# Altium PCB PCB2.PcbDoc
Units mil, origin at the board's own origin, x right, y up, seen from the top; angles counter-clockwise.
Board outline 3715 x 6645 mil, 2 copper layers (Top Layer, Bottom Layer); 85 components, 79 nets, 287 pads, 32 vias.
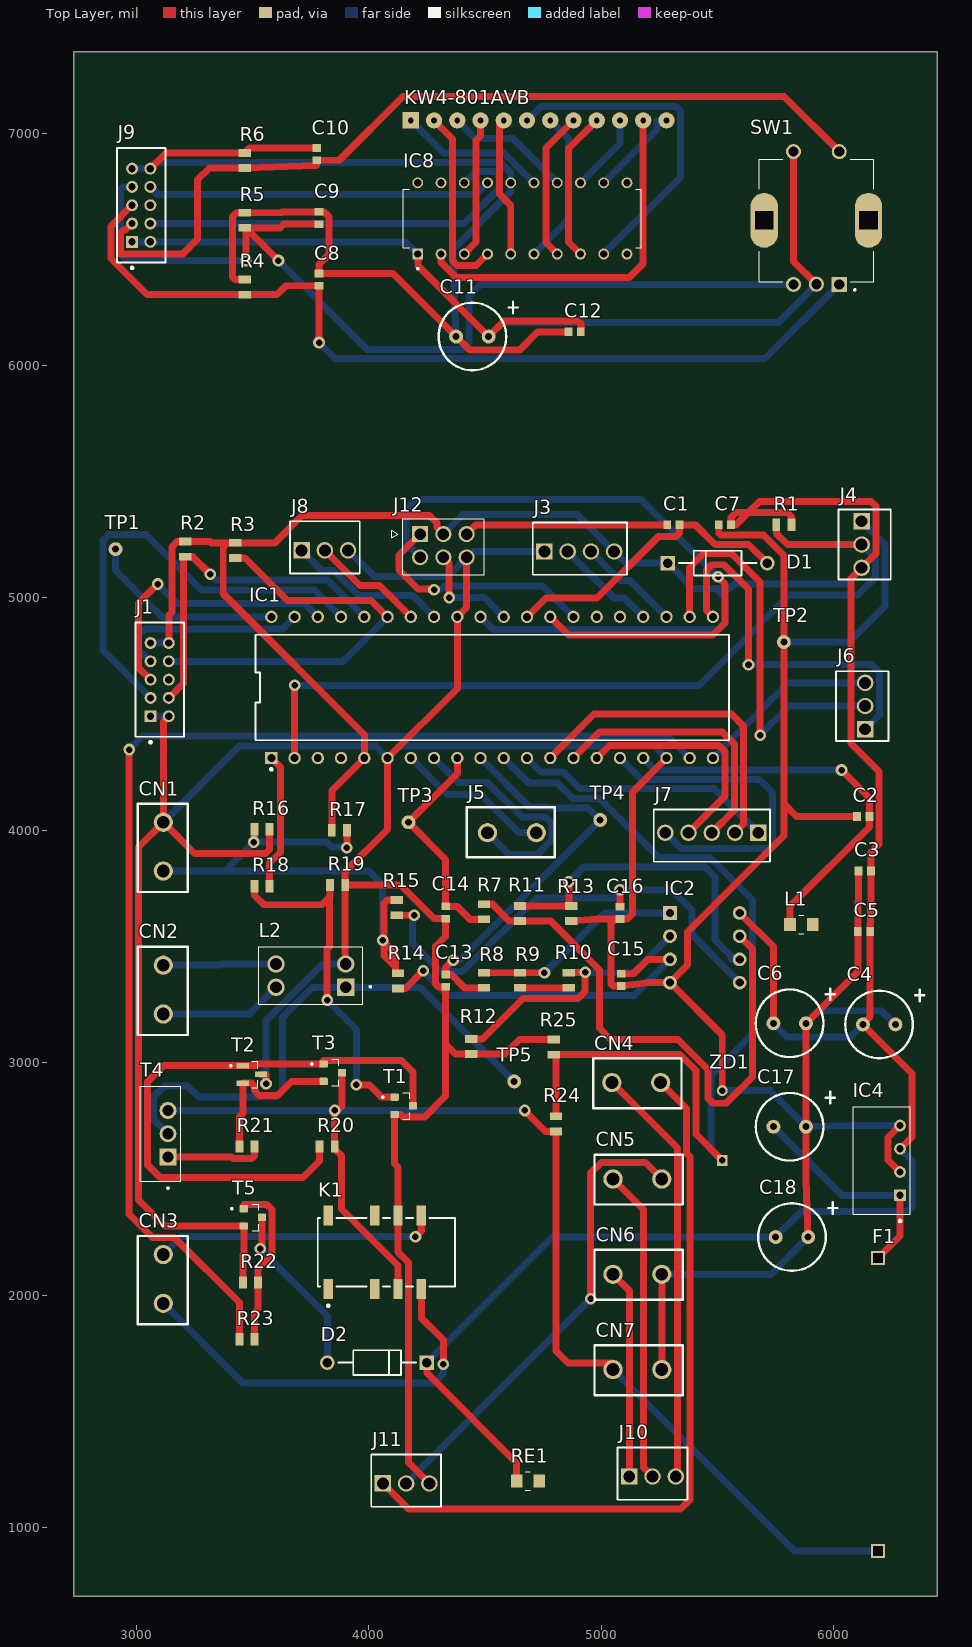
[diagram p0: Top Layer view]
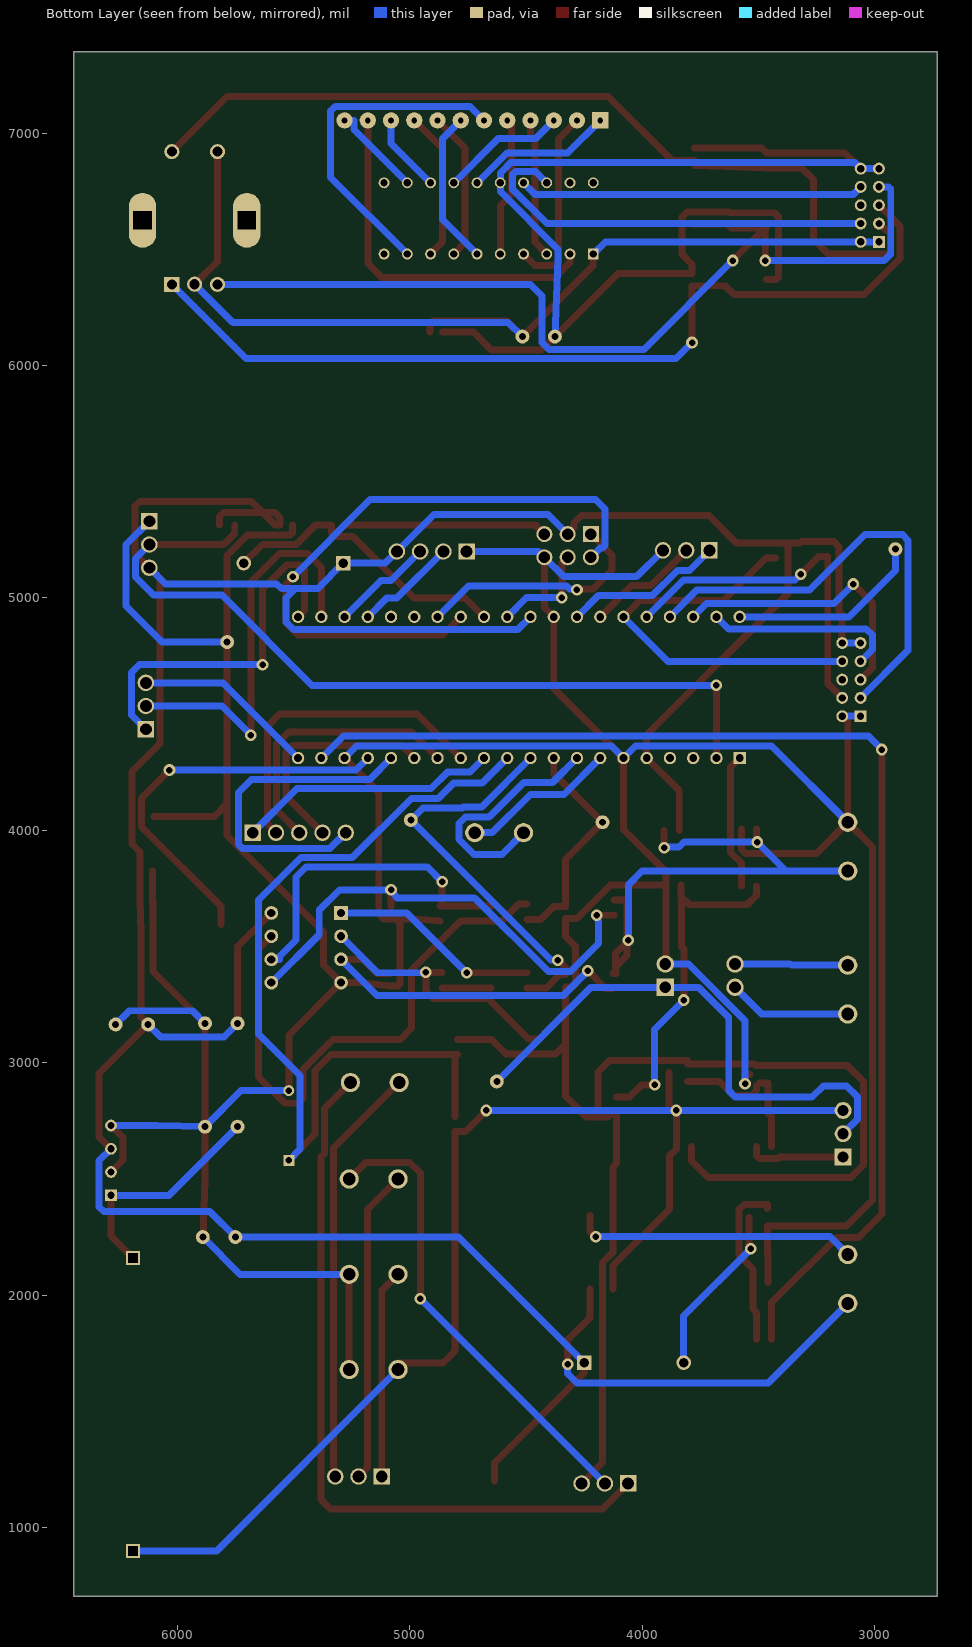
[diagram p1: Bottom Layer view, seen from below]

## Layer stack, top to bottom
Top Solder: solder mask 0.4, Solder Resist, Dk 3.5
Top Layer: signal copper 1.4
Dielectric 1: dielectric 12.6, FR-4, Dk 4.8
Bottom Layer: signal copper 1.4
Bottom Solder: solder mask 0.4, Solder Resist, Dk 3.5

## Board outline
2730,705 6445,705 6445,7350 2730,7350

## Design rules (kind name [scope] priority, off if disabled: settings)
Clearance [All] p1: gap=10 ignorepadtopadclearanceinfootprint=FALSE
HoleSize [All] p1: absolutevalues=TRUE maxlimit=120 minlimit=1 maxpercent=80.000 minpercent=20.000
PolygonConnect [All] p1: connectstyle=Relief reliefconductorwidth=10 reliefentries=4 polygonreliefangle="90 Angle" airgapwidth=10
RoutingVias [All] p1: holewidth=28 width=50 viastyle="Through Hole" minholewidth=28 minwidth=50 maxholewidth=28 maxwidth=50
SolderMaskExpansion [All] p1: expansion=4 istentingtop=FALSE
Width [All] p1: maxlimit=30 minlimit=10 preferedwidth=30 minimp=50.000000 maximp=50.000000 favimp=50.000000
29 further rules are at their usual default settings.

## Classes and differential pairs
component class VoedingBat20V: C17 C18 CN3 CN4 CN5 CN6 CN7 D2 F1 IC4 J10 J11 K1 R22 R23 R24 R25 RE1 T5 ZD1
component class SolBout: CN2 L2 R18 R19 R20 R21 T1 T2 T3 T4 TP5
component class SolBin: C13 C14 C15 C16 CN1 IC2 R7 R8 R9 R10 R11 R12 R13 R14 R15 R16 R17 TP3 TP4
component class Display: C8 C9 C10 C11 C12 IC8 J9 KW4-801AVB R4 R5 R6 SW1
component class CPU: C1 C2 C3 C4 C5 C6 C7 D1 IC1 J1 J3 J4 J5 J6 J7 J8 J12 L1 R1 R2 R3 TP1 TP2

## Components (designator, comment, footprint, x,y, rotation, side; value= is the part's Value field where it differs from the comment)
C1 "10n" CAPA 5310,5315 r0 top
C2 "100n" CAPA 6126.57,4060 r0 top
C3 "100n" CAPA 6133.43,3825 r0 top
C4 "10µF 50V" CAPA1 6195,3165 r0 top
C5 "100n" CAPA 6130,3565 r0 top
C6 "10µF 50V" CAPA1 5810,3170 r0 top
C7 "10n" CAPA 5531.57,5315 r0 top
C8 "10n" CAPA 3785,6370 r90 top
C9 "10n" CAPA 3785,6635 r90 top
C10 "10n" CAPA 3775,6910 r90 top
C11 "100µF" CAPA1 4445,6125 r0 top
C12 "100n" CAPA 4885,6145 r180 top
C13 "10n" CAPA 4330,3353.43 r90 top
C14 "10n" CAPA 4330,3646.57 r90 top
C15 "10n" CAPA 5085,3356.57 r90 top
C16 "10n" CAPA 5080,3645 r90 top
C17 "100µF 25V" CAPA1 5810,2725 r0 top
C18 "10µF 50V" CAPA1 5820,2250 r0 top
CN1 "1725656" "2 pinHeader" 3115,3930 r0 top
CN2 "1725656" "2 pinHeader" 3115,3315 r0 top
CN3 "1725656" "2 pinHeader" 3115,2070 r0 top
CN4 "Lader" "2 pinHeader" 5150,2915 r90 top
CN5 "Batterij 20V 2Ah - 4Ah" "2 pinHeader" 5155,2500 r90 top
CN6 "1725656" "2 pinHeader" 5155,2090 r90 top
CN7 "1725656" "2 pinHeader" 5155,1680 r90 top
D1 "1N4148" DIOD 5500,5150 r0 top
D2 "1N4007" DIOD 4035,1710 r180 top
F1 "F1" F1 6190,900 r90 top
IC1 "ATMEGA4809-PF" CPU 4530,4615 r90 top
IC2 "MCP6002-E/P" PDIP300-P8 5445,3495 r0 top
IC4 "OKI-78SR-5/1.5-W36-C" SIP625W50P254L1173H771Q4 6285,2430 r90 top
IC8 "IC1" DIP778W43P254L2612H431Q20N 4660,6633.15 r90 top
J1 "DF11-10DP-2DSA(24)" FP-DF11-10DP-2DSA_24-MFG 3099.37,4648.74 r90 top
J3 "640456-4" 4PinH 4755,5200 r0 top
J4 "B3B-PH-K-S(LF)(SN)" 3PinH 6120,5330 r270 top
J5 "1725656" "2 pinHeader" 4615,3990 r270 top
J6 "B3B-PH-K-S(LF)(SN)" 3PinH 6135,4435 r90 top
J7 "53261-0571" 5PinH 5675,3990 r180 top
J8 "B3B-PH-K-S(LF)(SN)" 3PinH 3710,5205 r0 top
J9 "DF11-10DP-2DSA(24)" FP-DF11-10DP-2DSA_24-MFG 3020,6690 r90 top
J10 "B3B-PH-K-S(LF)(SN)" 3PinH 5120,1220 r0 top
J11 "B3B-PH-K-S(LF)(SN)" 3PinH 4060,1190 r0 top
J12 "610106249121" 6Pin-Header 4220,5275 r180 top
K1 "G6S-2F-DC5" VermogenRelais 4075,2185 r0 top
KW4-801AVB "Display" DISP 4730,7055 r0 top
L1 "10µH" Smoorspoel 5860,3595 r0 top
L2 "Spoel" Spoel 3750,3375 r180 top
R1 "4K7" REST 5785,5315 r0 top
R2 "4K7" REST 3210,5210 r90 top
R3 "4K7" REST 3425,5205 r90 top
R4 "10K" REST 3465,6337.52 r90 top
R5 "10K" REST 3465,6625 r90 top
R6 "10K" REST 3465,6882.48 r90 top
R7 "5K6" REST 4495,3650 r90 top
R8 "5K6" REST 4495,3355 r90 top
R9 "18K" REST 4650,3355 r270 top
R10 "18K" REST 4860,3355 r90 top
R11 "18K" REST 4650,3642.48 r90 top
R12 "100E" REST 4440,3070 r90 top
R13 "100E" REST 4870,3642.48 r90 top
R14 "5K6" REST 4125,3352.48 r90 top
R15 "5K6" REST 4120,3667.48 r90 top
R16 "10M" REST 3540,4005 r180 top
R17 "1M" REST 3872.48,4000 r180 top
R18 "10K" REST 3540,3760 r180 top
R19 "4,7K" REST 3865,3765 r180 top
R20 "4,7K" REST 3820,2640 r0 top
R21 "100E" REST 3475,2640 r0 top
R22 "4,7K" REST 3490,2055 r180 top
R23 "10K" REST 3475,1810 r180 top
R24 "6,8K" REST 4805,2737.48 r90 top
R25 "10K" REST 4795,3067.48 r90 top
RE1 "SmoorSpoel" Smoorspoel 4683.43,1200 r0 top
SW1 "SW1" SW1 5925,6625 r180 top
T1 "BC847B" TRANS 4150,2815 r0 top
T2 "BC857C" SOT95P240X120-3N 3496.02,2950 r0 top
T3 "BC847B" TRANS 3844.37,2957.6 r0 top
T4 "MOSFET" TO254P1041X444X1930-3 3103.11,2695 r90 top
T5 "BC847B" TRANS 3500.63,2335 r0 top
TP1 "TP" TP 2910,5210 r0 top
TP2 "TP" TP 5785,4810 r0 top
TP3 "TP" TP 4170,4035 r0 top
TP4 "TP" TP 4995,4045 r0 top
TP5 "TP" TP 4625,2920 r0 top
ZD1 "5V1" ZEN 5520,2730.12 r90 top

## Footprints (in the part's own frame and the unit in brackets; to place one, negate y for a bottom-side part, rotate by r counter-clockwise, add the part's x,y. Pads: shape width x height; smd on the part's side, far side on the other; paste and mask are expansions set on the pad)
"2 pinHeader" [mm]
  round 2.1 hole 1.4: 1(0,-2.667) 2(0,2.667)
  silkscreen extent -2.79,-4.95 2.67,4.7
3PinH [mm] "TECO-640456-6_V"
  rect 1.8x1.8 hole 1.3: 1(0,0)
  round 1.8 hole 1.3: 2(2.54,0) 3(5.08,0)
  silkscreen extent -1.27,-2.54 6.35,3.18, body extent -1.27,-2.61 6.22,3.11, height 10.03
4PinH [mm] "TECO-640456-6_V"
  rect 1.8x1.8 hole 1.3: 1(0,0)
  round 1.8 hole 1.3: 2(2.54,0) 3(5.08,0) 4(7.62,0)
  silkscreen extent -1.27,-2.54 9.02,3.17, body extent -1.27,-2.54 9.02,3.17, height 10.03
5PinH [mm] "TECO-640456-6_V"
  rect 1.8x1.8 hole 1.3: 1(0,0)
  round 1.8 hole 1.3: 2(2.54,0) 3(5.08,0) 4(7.62,0) 5(10.16,0)
  silkscreen extent -1.27,-2.54 11.43,3.18, body extent -1.27,-2.54 11.43,3.18, height 10.03
6Pin-Header [mm] "MOLEX_1510481611"
  rect 1.75x1.75 / inner round 1.75 / far side rect 1.75x1.75 hole 1.25 mask+0.076: 1(0,0)
  round 1.75 hole 1.25 mask+0.076: 2(-2.54,0) 3(-5.08,0) 4(0,2.54) 5(-2.54,2.54) 6(-5.08,2.54)
  silkscreen extent -6.98,-1.65 3.13,4.44
CAPA [mm]
  rect 0.85x0.95 smd: 1(-0.675,0) 2(0.675,0)
  body extent -0.85,-0.45 0.85,0.45, height 0.9
CAPA1 [mil]
  round 60 hole 30: 1(-70,0) 2(70,0)
  silkscreen extent -145,-145 195,150
CPU [mm] "FP-C04-016-MFG"
  rect 1.35x1.35 hole 0.85 paste-2539.97 mask+0: 1(-7.715,24.13)
  round 1.35 hole 0.85 paste-2539.97 mask+0: 2(-7.715,21.59) 3(-7.715,19.05) 4(-7.715,16.51) 5(-7.715,13.97) 6(-7.715,11.43) 7(-7.715,8.89) 8(-7.715,6.35) 9(-7.715,3.81) 10(-7.715,1.27) 11(-7.715,-1.27) 12(-7.715,-3.81) 13(-7.715,-6.35) 14(-7.715,-8.89) 15(-7.715,-11.43) 16(-7.715,-13.97) 17(-7.715,-16.51) 18(-7.715,-19.05) 19(-7.715,-21.59) 20(-7.715,-24.13) 21(7.715,-24.13) 22(7.715,-21.59) 23(7.715,-19.05) 24(7.715,-16.51) 25(7.715,-13.97) 26(7.715,-11.43) 27(7.715,-8.89) 28(7.715,-6.35) 29(7.715,-3.81) 30(7.715,-1.27) 31(7.715,1.27) 32(7.715,3.81) 33(7.715,6.35) 34(7.715,8.89) 35(7.715,11.43) 36(7.715,13.97) 37(7.715,16.51) 38(7.715,19.05) 39(7.715,21.59) 40(7.715,24.13)
  silkscreen extent -9.07,-25.88 5.76,25.88, body extent -8.49,-26.71 8.49,26.71, height 0.25
DIOD [mm] "FP-1N4001-E3-54-MFG"
  rect 1.6x1.6 hole 1.05 paste-2539.97 mask+0: 1(-5.438,0)
  round 1.6 hole 1.05 paste-2539.97 mask+0: 2(5.438,0)
  silkscreen extent -4.24,-1.35 4.24,1.35, body extent -6.34,-1.45 6.34,1.45, height 0.25
DIP778W43P254L2612H431Q20N [mm] "Led drive control"
  rect 1.19x1.19 hole 0.79: 1(-3.89,11.43)
  round 1.19 hole 0.79: 2(-3.89,8.89) 3(-3.89,6.35) 4(-3.89,3.81) 5(-3.89,1.27) 6(-3.89,-1.27) 7(-3.89,-3.81) 8(-3.89,-6.35) 9(-3.89,-8.89) 10(-3.89,-11.43) 11(3.89,-11.43) 12(3.89,-8.89) 13(3.89,-6.35) 14(3.89,-3.81) 15(3.89,-1.27) 16(3.89,1.27) 17(3.89,3.81) 18(3.89,6.35) 19(3.89,8.89) 20(3.89,11.43)
  silkscreen extent -5.58,-13 3.2,13, body extent -4.03,-13 4.03,13, height 4.31
DISP [mil]
  rect 70x70 hole 25: 1(-550,0)
  round 70 hole 25: 2(-450,0) 3(-350,0) 4(-250,0) 5(-150,0) 6(-50,0) 7(50,0) 8(150,0) 9(250,0) 10(350,0) 11(450,0) 12(550,0)
F1 [mil]
  rect 60x60 hole 40 square: 1(0,0) 2(1259.84,0)
FP-DF11-10DP-2DSA_24-MFG [mm]
  rect 1.3x1.3 hole 0.8 paste-2539.97 mask+0: 1(-4,1)
  round 1.3 hole 0.8 paste-2539.97 mask+0: 2(-4,-1) 3(-2,1) 4(-2,-1) 5(0,1) 6(0,-1) 7(2,1) 8(2,-1) 9(4,1) 10(4,-1)
  silkscreen extent -6.97,-2.65 6.25,2.65, body extent -6.35,-2.75 6.35,2.75, height 0.25
PDIP300-P8 [mm] "8-Pin Plastic Dual In-Line Package (PDIP)"
  rect 1.5x1.5 hole 0.9: 1(-3.81,3.81)
  round 1.5 hole 0.9: 2(-3.81,1.27) 3(-3.81,-1.27) 4(-3.81,-3.81) 5(3.81,-3.81) 6(3.81,-1.27) 7(3.81,1.27) 8(3.81,3.81)
  body extent -3.55,-4.9 3.55,4.9, height 4.32
REST [mm]
  rect 0.85x1.35 smd: 1(-0.825,0) 2(0.825,0)
  body extent -1.1,-0.72 1.1,0.72, height 0.5
SIP625W50P254L1173H771Q4 [mm]
  rect 1.288x1.288 hole 0.78: 1(0,0)
  round 1.288 hole 0.78: 2(2.54,0) 3(5.08,0) 4(7.62,0)
  silkscreen extent -2.9,-1.14 9.68,5.13
Smoorspoel [mm] "INDM2520X190N"
  rect 1.26x1.41 smd: 1(-1.23,0) 2(1.23,0)
  silkscreen extent -0.28,-1 0.28,1, body extent -1.25,-1 1.25,1, height 1.9
SOT95P240X120-3N [mm]
  rect 1.34x0.6 smd: 1(-0.99,0.95) 2(-0.98,-0.95) 3(0.99,0)
  silkscreen extent -2.39,-1.45 0.65,1.45, body extent -1.2,-1.46 1.2,1.46, height 1.2
Spoel [mil] "XFMR_CM2545X171B-10"
  rect 75x75 hole 50: 1(-150,50)
  round 75 hole 50: 2(-150,-50) 3(150,-50) 4(150,50)
  silkscreen extent -260,-124 224,124, body extent -224,-124 224,124, height 374
SW1 [mm] "PEC11R-4225F-S0024"
  rect 1.65x1.65 hole 1.1: 1(-2.5,7)
  round 1.65 hole 1.1: 2(2.5,7) 3(0,6.985) 4(-2.5,-7.5) 5(2.5,-7.5)
  oval 3x6 hole 2 square: 6(5.7,0) 7(-5.7,0)
  silkscreen extent -6.25,-6.7 6.25,7.7
TO254P1041X444X1930-3 [mm]
  rect 1.845x1.845 / inner round 1.845 / far side rect 1.845x1.845 hole 1.23: 1(-2.54,-0.81)
  round 1.845 hole 1.23: 2(0,-0.81) 3(2.54,-0.81)
  silkscreen extent -6.06,-2.22 5.21,2.22
TP [mil]
  round 60 hole 30: 1(0,0)
TRANS [mm] "BC847B"
  rrect25% 0.9x0.8 smd: 1(-1,0.95) 2(-1,-0.95) 3(1,0)
  silkscreen extent -2.4,-1.45 0.65,1.45, body extent -1.2,-1.46 1.2,1.46, height 1.2
VermogenRelais [mm] "G6S-2F-DC5"
  rect 1x2.2 smd paste+0 mask+0: 1(-6.35,-4) 3(-1.27,-4) 4(1.27,-4) 5(3.81,-4) 8(3.81,4) 9(1.27,4) 10(-1.27,4) 12(-6.35,4)
  silkscreen extent -7.5,-5.97 7.5,3.75, body extent -7.6,-5.2 7.6,5.2, height 0.25
ZEN [mm]
  rect 1.2x1.2 hole 0.7 paste-2539.97 mask+0: 1(-3.813,0)
  round 1.2 hole 0.7 paste-2539.97 mask+0: 2(3.813,0)

## Part data
C1 C2 C3 C5 C7 C8 C9 C10 C12 C13 C14 C15 C16: library part Capasitor, Manufacturer=Murata, Part Number=GRM1885C1H100JA01D
C4 C6 C11 C17 C18: library part Capasitor_1, Manufacturer=Murata, Part Number=GRM1885C1H100JA01D
CN1 CN2 CN3 CN6 CN7 J5: library part 2Pin-Header, Colour=Green, Manufacturer="Phoenix Contact", Content=250pc(s), Datasheet URL=http://datasheet.octopart.com/1725656-Phoenix-Contact-datasheet-5302866.pdf, Datasheet Version=Apr-08, Industrial packaging=Yes, Manufacturer part No.=1725656, Manufacturer URL=http://www.phoenixcontact.com/, Number of contacts=2, Pitch=2.54mm, Type=MPT0,5/2-2,54
CN4 CN5: library part 2Pin-Header, Colour=Green, Manufacturer="Phoenix Contact", Manufacturer part No.=1725656, Content=250pc(s), Datasheet URL=http://datasheet.octopart.com/1725656-Phoenix-Contact-datasheet-5302866.pdf, Datasheet Version=Apr-08, Industrial packaging=Yes, Manufacturer URL=http://www.phoenixcontact.com/, Number of contacts=2, Pitch=2.54mm, Type=MPT0,5/2-2,54
D1 D2: library part Diode, "1N4001-E3/54", Average Rectified Current=1A, Capacitance=15pF, Case/Package=DO-204AL, Forward Voltage=1.1V, Max Forward Surge Current (Ifsm)=30A, Max Operating Temperature=150°C, Max Repetitive Reverse Voltage (Vrrm)=50V, Max Reverse Current=5uA, Min Operating Temperature=-50°C, Package Quantity=5500, Peak Non-Repetitive Surge Current=45A, Current=1A, Current Rating=1A, Diameter=2.7mm, Element Configuration=Single, Forward Current=1A, Height=2.7mm, Lead Free="Lead Free", Length=0.204inch, Max Reverse Voltage (DC)=50V, Max Surge Current=30A, Mount="Through Hole", Number of Pins=2, Output Current=1A, Packaging="Tape and Reel", Polarity=Standard, Radiation Hardening=No, Reverse Voltage=50V, RoHS Compliant=Yes, Series=-, Voltage=50V, Voltage Rating (DC)=50V, Width=2.7mm
IC1: library part CPU, "IC MCU 8BIT 48KB FLASH 40DIP ATMEGA4809-PF", RoHS Compliant=Yes
IC2: library part CMP-0187-00133-3, Case/Package=PDIP, Input Bias Current=1pA, Input Offset Voltage (Vos)=4.5mV, Max Operating Temperature=125°C, Max Supply Voltage=6V, Min Operating Temperature=-40°C, Min Supply Voltage=1.8V, Nominal Supply Current=100uA, Operating Supply Voltage=5.5V, Output Current=23mA, Package Quantity=60, Power Supply Rejection Ratio (PSRR)=86dB, Voltage Gain=112dB, Amplifier Type="GENERAL PURPOSE", Bandwidth=1MHz, Common Mode Rejection Ratio=60dB, Gain Bandwidth Product=1MHz, Height=3.3mm, Input Offset Voltage-Max=4.5mV, Lead Free="Lead Free", Length=9.27mm, Mount="Through Hole", Number of Amplifiers=2, Number of Channels=2, Number of Circuits=2, Number of Elements=2, Number of Pins=8, Operating Supply Current=100uA, Output Current per Channel=23mA, Packaging=Rail/Tube, Radiation Hardening=No, REACH SVHC="No SVHC", RoHS Compliant=Yes, Slew Rate=0.6V/µs, Slew Rate-Nom=0.6V/µs, Supply Current=100uA, Technology=CMOS, Unity Gain Bandwidth Product=1MHz, Width=6.35mm
IC4: library part IC, Current - Output (Max)=1.5A, Manufacturer=Murata, Operating Temperature=-40degC~85degC, Package / Case=3-SIPModule, Power (Watts) - Manufacture Series=8W, Voltage - Input (Max)=36V, Voltage - Input (Min)=7V, Voltage - Isolation=-, Voltage - Output 1=5V, Applications=ITE(Commercial), Category=PowerSupplies-BoardMount, Datasheet URL=https://datasheet.ciiva.com/8006/1790439-8006672.pdf, Datasheet Version=Oct-13, Efficiency=90.5%, Family=DCDCConverters, Features=SCP, Manufacturer URL=http://www.murata.com/, Mounting Type=ThroughHole, Number of Outputs=1, Packaging=Tube, Power (Watts) - Max=8W, Series=Okami™OKI-78SR, Size / Dimension="0.41\"Lx0.30\"Wx0.65\"H(10.4mmx7.6mmx16.5mm)", Type=LinearRegulatorReplacement, Voltage - Output 2=-, Voltage - Output 3=-
IC8: "TM1637"
J1 J9: library part CMP-11610-000008-1, "CONN HEADER VERT 10POS 2MM", Current Rating=2A, Manufacturer=Hirose, Temperature="-40°C to +85°C", Temperature Range High=+85°C, Temperature Range Low=-40°C, Voltage Rating=250V, Automotive=No, Category=Conn, ComponentLink2Description=Datasheet, ComponentLink2URL=https://www.hirose.com/product/document?clcode=CL0543-0520-0-24&productname=DF11-10DP-2DSA(24)&series=DF11&documenttype=Catalog&lang=en&documentid=D31688_en, Conn Gender=Male, Conn Orientation=Straight, Contact Material=Tin,Nickel, Device Class L1=Connectors, Device Class L2="Headers and Wire Housings", Device Class L3=unset, Digikey Description="CONN HEADER VERT 10POS 2MM", Footprint Url=https://www.hirose.com/product/document?clcode=CL0543-0520-0-24&productname=DF11-10DP-2DSA(24)&series=DF11&documenttype=2DDrawing&lang=en&documentid=0000995333, Height=6.9mm, Lead Free=Yes, Manufacturer Part Number=DF11-10DP-2DSA(24), Mouser Description="Headers & Wire Housings 10P STRT HEADER THRU HL,BD MNT,SN", Number of contacts=10, Number Of Rows=2, Octopart=https://octopart.com/df11-10dp-2dsa%2824%29-hirose-39521433, Package=DF11-10DP-2DSA(24), Pitch=2mm, RoHS=TRUE
J3: library part 4Pin-Header, Color=White, Current, Rating="5 /  / A", Flammability Rating=UL94V-0, Manufacturer="TE Connectivity", Temperature, Operating="-55to+105 /  / degC", Voltage, Rating="250 /  / V", Agency Approvals=CSA,UL, Angle=Straight, Brand/Series=MTA-100Series, Color, Housing=White, Connector Type=MTA-100, Contact Centerline Spacing="0.100 /  / in.", Contact Mating Area Plating=Tin, Contact Plating=Tin, Contact Shape=Square, Contact Termination Area Plating=Tin, Datasheet URL=https://datasheet.ciiva.com/16286/eng-ds-82056-mta-0608-16286228.pdf, Datasheet Version=Dec-14, Length, Overall="0.4 /  / \"", Length, Pin="0.14 /  / \"", Length, Terminal Post="0.14 /  / in.", Manufacturer URL=http://www.te.com/, Material, Contact=CopperAlloy, Material, Housing=Polyester, Mount Angle=Vertical, Mounting Hole Size="0.04 /  / \"", Mounting Type=PCMount, Number of contacts=4, Number of Positions=4, Number Of Rows=1, Pin Spacing="0.1 /  / \"", Primary Type=InterconnectSystem, Size, Post="0.025 /  / in.", Special Features=Pinstrip, Standards=RoHSCompliant,ELVCompliant,UL94V-0, Termination=Solder, Type=PCBPlug
J4 J6 J8 J10 J11: library part 3Pin-Header, Manufacturer=JST, Datasheet URL=https://datasheet.ciiva.com/11746/0900766b80826550-11746939.pdf, Datasheet Version=Oct-06, Manufacturer URL=http://www.jst.com/home2.html, No of Positions=3, Pitch=2mm, Style/Orientation=StraightHeader/Plug, Termination=Crimp, Type=ShroudedHeader
J7: library part 5Pin-Header, Current Rating=1A, Manufacturer=Molex, Voltage Rating=125V, Brand=Molex, Contact Material=PhosphorBronze, Contact Plating=Tin, Datasheet URL=http://datasheet.octopart.com/532610571-Molex-datasheet-8343080.pdf, Datasheet Version="Rev. D, 04/2004", Factory Pack Quantity=1000, Housing Material=Thermoplastic, Manufacturer URL=http://www.molex.com/, Mounting Angle=Right, Mounting Style=SMD/SMT, Number of Positions=5, Number of Positions / Contacts=5, Number Of Rows=1, Packaging=Reel, Pitch=1.25mm, Product Category=Headers&WireHousings, Product Type=Headers, RoHS=Details, Series=53261, Termination Style=SMD, Tradename=PicoBlade, Type=Shrouded
J12: library part 6Pin-Header, "CMP-1502-01146-2", Color=Black, Contact Resistance=20mΩ, Current Rating=3A, Operating Supply Voltage=250V, Connector Type="Male Pin", Contact Mating Length=5.9944mm, Contact Plating=Gold, Gender=Male, Lead Pitch=2.54mm, Mount="Surface Mount", NexarPartId=52645089, Number of contacts=6, Number of Pins=6, Number of Positions=6, Number Of Rows=2, Packaging="Tape and Reel", Pitch=2.54mm, REACH SVHC=Unknown, RoHS=Compliant, Row Spacing=2.54mm, Termination=Solder
K1: library part VermogenRelais, Ambient Temperature Range High=+85°C, Ambient Temperature Range Low=-40°C, Coil Power=403mW, Coil Resistance=62Ω, Coil Voltage=5V, Current Rating=8A, Manufacturer="TE Connectivity", Manufacturer Part Number=RT424005, Automotive=No, Category=Relay, Coil Type=Non-Latching, ComponentLink2Description=Datasheet, ComponentLink2URL=https://www.te.com/commerce/DocumentDelivery/DDEController?Action=showdoc&DocId=Data+Sheet%7FRT2%7F1014%7Fpdf%7FEnglish%7FENG_DS_RT2_1014.pdf%7F5-1393243-9, Device Class L1=Electromechanical, Device Class L2=Relays, Device Class L3="Power Relays", Digikey Description="RELAY GENERAL PURPOSE DPDT 8A 5V", Height=15.7mm, Lead Free=Yes, Mouser Description="General Purpose Relay, Rt2 Series, Power, Non Latching, Dpdt, 5 Vdc, 8 A Rohs Compliant: Yes", Number of contacts=2, Octopart=https://octopart.com/5-1393243-9-te+connectivity-41835766, Package=RT424005, RoHS=TRUE, Throw Configuration=DPDT
KW4-801AVB: "KW4-801AVB"
L1: library part SmoorSpoel, "Surface Mount High Frequency Inductor, NLV Series, 10 H, 5%, 1008 [2520 Metric], 33 MHz, 3.5 ohm NLV25T-100J-EF", Package="SMD-2 TDK", Availability="In Stock", Check_prices=https://www.snapeda.com/parts/NLV25T-100J-EF/TDK/view-part/?ref=eda, MF=TDK, MP=NLV25T-100J-EF, Price=None, Purchase-URL=https://pricing.snapeda.com/search/part/NLV25T-100J-EF/?ref=eda, SnapEDA_Link=https://www.snapeda.com/parts/NLV25T-100J-EF/TDK/view-part/?ref=snap
L2: "2 Line Common Mode Choke Through Hole 170 Ohms @ 100 MHz 10A DCR 10mOhm CM2545X171B-10", Package="Vertical-4 Laird", Availability="In Stock", Check_prices=https://www.snapeda.com/parts/CM2545X171B-10/Laird/view-part/?ref=eda, MF=Laird, MP=CM2545X171B-10, Price=None, Purchase-URL=https://pricing.snapeda.com/search/part/CM2545X171B-10/?ref=eda, SnapEDA_Link=https://www.snapeda.com/parts/CM2545X171B-10/Laird/view-part/?ref=snap
R1 R2 R3 R4 R5 R6 R7 R8 R9 R10 R11 R12 R13 R14 R15 R16 R17 R18 R19 R20 R21 R22 R23 R24 R25: library part resistor, Manufacturer="Vishay Dale", Part Number=CRCW08050000Z0EA
RE1: "Surface Mount High Frequency Inductor, NLV Series, 10 H, 5%, 1008 [2520 Metric], 33 MHz, 3.5 ohm NLV25T-100J-EF", Package="SMD-2 TDK", Availability="In Stock", Check_prices=https://www.snapeda.com/parts/NLV25T-100J-EF/TDK/view-part/?ref=eda, MF=TDK, MP=NLV25T-100J-EF, Price=None, Purchase-URL=https://pricing.snapeda.com/search/part/NLV25T-100J-EF/?ref=eda, SnapEDA_Link=https://www.snapeda.com/parts/NLV25T-100J-EF/TDK/view-part/?ref=snap
SW1: "PEC11R-4225F-S0024"
T1 T3 T5: library part Transistor, Manufacturer="On Semiconductor", PartNumber=BC547C, ComponentLink1Description="Manufacturer URL", ComponentLink1URL=http://www.onsemi.com/, ComponentLink2Description=Datasheet, ComponentLink2URL=http://www.onsemi.com/pub_link/Collateral/BC546-D.PDF, ComponentLink3Description="Package Specification", ComponentLink3URL=http://www.onsemi.cn/pub_link/Collateral/2N6426-D.PDF, DatasheetVersion="Rev. 7", fT Min (MHz)=150, IC Continuous (A)=0.1, Mounting Technology="Through Hole", PackageDescription="3-Pin Transistor Outline, Body 4.825 x 3.685 mm, Pitch 1.27 mm", PackageReference=TO-92-3-29-11_AM_SL, PackageVersion="Rev. AM", Packing="Bulk Box", Polarity=NPN, RoHS=FALSE
T2: library part BC857B, "BJT, SOT-23, 45V, 100mA, PNP, 0.25W, 150C", Package="SOT-23-3 Diotec", Check_prices=https://www.snapeda.com/parts/BC857B/Diotec/view-part/?ref=eda, MF=Diotec, MP=BC857B, SnapEDA_Link=https://www.snapeda.com/parts/BC857B/Diotec/view-part/?ref=snap
T4: "P-Channel 60V 18A _Tc_ 3.7W _Ta_, 88W _Tc_ Surface Mount D2PAK IRF9Z34SPBF", Package="D2PAK Vishay", Availability=Unavailable, MF=Vishay, MP=IRF9Z34SPBF, Price=None, SnapEDA_Link=https://www.snapeda.com/parts/IRF9Z34SPBF/Vishay%20Siliconix/view-part/390212/?ref=snap
TP1 TP2 TP3 TP4 TP5: Manufacturer=Murata, Part Number=GRM1885C1H100JA01D
ZD1: library part Zenerdiode

## Via types
v1: diameter 50, hole 28, Top Layer to Bottom Layer, 32 vias

## Nets (pads, with @x,y where several pads share a name; then routed paths per layer and width w, separated by ;. In a path a pad name is that pad's centre, name@x,y a point inside that pad or via, vN(x,y) a via of type N, cw(c..) or ccw(c..) an arc to the next point about the centre after c; other vN are vias at no path point)
+5: C3.2 C4.1 C5.2 C6.1 C7.2 C18.1 D1.1 D2.1 IC1.5 IC1.31 IC2.8 IC4.3 J1.9 J1.10 J3.4 J4.3 J12.2 R1.2 R2.2 R3.2 R17.2 RE1.1 | length 14859.2
  Top Layer w30: J1.10 3138.74,4926.26 3152.37,4939.89 3152.37,5220 3174.85,5242.48 R2.2 3315,5242.48 3320,5237.48 3390,5237.48 ; R17.2 3840,4171.25 IC1.5 3980,4411.2 3373,5018.2 3373,5220.48 3390,5237.48 ; D2.1 4249.09,1664.46 4635,1278.55 RE1.1 ; J12.2 4292,5303 4292,5322 4260,5354 3712,5354 3595.48,5237.48 R3.2 3390,5237.48 ; IC2.8 5740,3500 C6.1 ; R1.2 5817.48,5350 5800.48,5367 5632,5367 ; IC4.3 6336,2681 6336,2954 C4.1 6156.57,3196.57 C5.2 6160,3698.43 C3.2 6160,3907 6195,3942 6195,4253 6074,4374 6074,5084 J4.3 6181,5191 6181,5395 6160,5416 5681,5416 5632,5367 ; 5632,5367 5580,5367 5558.15,5345.15 C7.2 5580,5315 5632,5367
  Bottom Layer w30: J1.9 J1.10 ; D2.1 4789.09,2250 C18.1 5860,2360 6316,2360 6336,2380 6336,2579 IC4.3 ; J12.2 4405,5360 4895,5360 J3.4 5105,5150 D1.1 5394.91,5041 5491,5041 ; IC1.31 4534.75,4864 5500,4864 5532,4896 5532,5000 5491,5041 ; C6.1 5799,3111 6071,3111 C4.1 ; J4.3 6051,5061 5572,5061 5552,5041 5491,5041
GND: C2.1 C3.1 C4.2 C5.1 C6.2 C7.1 C13.1 C14.1 C15.1 C16.1 C17.2 C18.2 CN1.2 CN6.1 CN7.1 IC1.6 IC1.18 IC1.32 IC2.4 IC4.2 IC4.4 J1.1 J1.2 J3.1 J4.1 J8.3 J11.3 J12.6 K1.9 L2.2 R12.1 R13.1 R16.1 R19.1 R22.2 R25.2 T1.2 T2.3 T5.2 TP2.1 ZD1.2 | length 23366.3
  Top Layer w30: J1.2 3115,4467.52 CN1.2 ; R22.2 3457.52,2174 3461.26,2177.74 T5.2 3120.4,2297.6 3008,2410 3008,3928 CN1.2 ; T2.3 3557,2950 v1(3557,2910) ; R16.1 3572.48,3917.48 3555,3900 3250,3900 CN1.2 ; L2.2 3897.48,3482.48 R19.1 ; J11.3 4170,1280 4170,2140 4125,2185 K1.9 4125,2552 4110.63,2566.37 T1.2 4136,2777.6 4146.28,2767.32 4240,2767.32 4330,2857.32 4330,3080 ; J12.6 4420,4958.75 IC1.32 4380,4611.25 IC1.6 4080,4004.52 3897.48,3822 R19.1 ; R25.2 4648.44,3099.96 4586,3037.52 R12.1 4372.48,3037.52 4330,3080 ; R13.1 4983.43,3618.43 5059.43,3618.43 ; CN7.1 CN6.1 ; IC1.18 5133,4164.25 5133,3640 5111.43,3618.43 C16.1 5059.43,3618.43 ; C7.1 5505,5280 5514,5271 5697.01,5271 5785,5183.01 TP2.1 5785,4115 ; ZD1.2 5520,3120 IC2.4 ; C18.2 5880,2498 C17.2 C6.2 6103.43,3393.43 C5.1 6103.43,3693 6106.85,3696.42 C3.1 ; C2.1 5840,4060 5785,4115 ; IC4.2 6234,2581 6234,2679 IC4.4 ; R19.1 4135,3765 4280,3620 C14.1 4330,3544 4286,3500 4286,3340 4299.15,3326.85 C13.1 4330,3080 ; 5059.43,3618.43 5041,3600 5041,3340 5051,3330 C15.1 5205,3345 IC2.4 ; IC2.4 5370,3420 5370,3563 5785,3978 5785,4115
  Bottom Layer w30: J1.1 J1.2 ; CN1.2 3443,4363 4028.25,4363 IC1.6 4131.75,4363 5228.25,4363 IC1.18 ; v1(3557,2910) 3557,3181 3801,3425 L2.2 ; J8.3 4023,5092 4337,5092 J12.6 4445,5200 J3.1 ; CN6.1 5730,2090 C18.2 ; ZD1.2 5724.76,2880.24 C17.2 6088,2730 IC4.4 ; TP2.1 6064.75,4810 6220.43,4965.68 6220.43,5229.57 J4.1 ; C6.2 5934,3224 6206,3224 C4.2
NetC1_1: C1.1 J12.3 | length 880
  Top Layer w30: J12.3 4460,5315 C1.1
NetC1_2: C1.2 D1.2 IC1.29 | length 1287.1
  Top Layer w30: IC1.29 4761.25,5000 4981,5000 5244.57,5263.57 5320.15,5263.57 5336.57,5280 C1.2 5404,5315 5488,5231 5633.09,5231 D1.2
NetC2_2: C2.2 IC1.17 L1.1 | length 1730.5
  Top Layer w30: L1.1 5811.57,3673.57 6153.15,4015.15 C2.2 6153.15,4139.85 v1(6033.33,4259.67)
  Bottom Layer w30: IC1.17 5231.58,4259.67 v1(6033.33,4259.67)
NetC8_1: C8.1 J9.5 R4.1 SW1.1 | length 3886.3
  Top Layer w30: J9.5 2890.04,6599.41 2890.04,6460 3045,6305.04 R4.1 3605,6305.04 3643.39,6343.43 C8.1 v1(3785,6099)
  Bottom Layer w30: v1(3785,6099) 3854,6030 5704.02,6030 SW1.1
NetC8_2: C8.2 C9.2 C10.2 C11.1 C12.2 IC8.16 J9.9 J9.10 R4.2 R5.2 R6.2 | length 5474.2
  Top Layer w30: J9.10 3126.85,6914.96 R6.2 3486.61,6936.57 C10.2 ; R4.2 3423,6370 3413,6380 3413,6640.48 3430,6657.48 R5.2 3622,6657.48 3626.09,6661.57 C9.2 3807.43,6661.57 3829,6640 3829,6479 3785,6435 C8.2 4103.43,6396.57 C11.1 4434,6066 4647,6066 4726,6145 C12.2
  Bottom Layer w30: J9.9 J9.10 3086.62,6874.73 4563.7,6874.73 4610,6828.43 IC8.16 4610,6749 4361,6500 4361,6460 C11.1
NetC9_1: C9.1 J9.7 R5.1 SW1.2 | length 4157.8
  Top Layer w30: R5.1 R5.1@3470,6592.52 ; v1(3470,6452) R5.1@3470,6592.52 ; v1(3610.52,6452) R5.1@3470,6592.52 ; C9.1 3632.91,6608.43 3617,6592.52 R5.1@3470,6592.52
  Bottom Layer w30: J9.7 2940,6768.74 2930,6758.74 2930,6480 2958,6452 v1(3470,6452) ; v1(3610.52,6452) 3992.52,6070 4400,6070 4430,6100 4430,6299.41 4480,6349.41 SW1.2
NetC10_1: C10.1 J9.3 R6.1 SW1.4 | length 3788.1
  Top Layer w30: J9.3 2952.48,6583.11 2943.15,6583.11 2930.04,6570 2930.04,6481.93 2930.97,6481 3200,6481 3263,6544 3263,6800 3313,6850 R6.1 3775,6860 C10.1 3872,6883.43 4146.57,7158 5785.7,7158 SW1.4
NetC11_2: C11.2 C12.1 IC8.1 J9.1 J9.2 SW1.3 SW1.5 | length 4311.2
  Top Layer w30: IC8.1 4210,6430 C11.2 4582,6192 4900,6192 4911.57,6180.43 C12.1 ; SW1.5 5826.57,6448.43 SW1.3
  Bottom Layer w30: J9.1 J9.2 4157.48,6532.52 IC8.1 ; C11.2 4576,6186 5761,6186 SW1.3
NetC13_2: C13.2 IC1.10 R8.1 TP4.1 | length 1772.1
  Top Layer w30: v1(4362,3442) 4330,3410 C13.2 4354.52,3380 4412,3322.52 R8.1
  Bottom Layer w30: v1(4362,3442) 4392,3442 TP4.1 4943,4097 4772.09,4097 4769.42,4099.67 4691.58,4099.67 IC1.10
NetC14_2: C14.2 IC1.9 R7.1 TP3.1 | length 979.4
  Top Layer w30: IC1.9 4380,4245 TP3.1 4330,3875 C14.2 4379.85,3673.15 4435.48,3617.52 R7.1
NetC15_2: C15.2 IC2.3 R14.1 | length 1545.2
  Top Layer w30: R14.1 4157,3320 v1(4233,3396) ; C15.2 5139,3383.15 5200.85,3445 IC2.3
  Bottom Layer w30: v1(4233,3396) 4339,3290 5140,3290 IC2.3
NetC16_2: C16.2 IC2.5 R15.1 | length 2106.4
  Top Layer w30: R15.1 4120.18,3634.82 4194.47,3634.82 v1(4194.64,3634.64) ; C16.2 v1(5080,3744)
  Bottom Layer w30: v1(4194.64,3634.64) 4190.82,3630.82 4190.82,3616.68 4187,3612.86 4187,3513 4308,3392 4403,3392 4720,3709 5054,3709 v1(5080,3744) 5302,3744 5389,3657 5389,3551 IC2.5
NetC17_1: C17.1 F1.2 IC4.1 | length 976.7
  Top Layer w30: F1.2 6285,2254.84 IC4.1
  Bottom Layer w30: C17.1 6035,2430 IC4.1
NetCN1_1: CN1.1 R14.2 R15.2 R16.2 R17.1 | length 2483.7
  Top Layer w30: v1(3505,3950) 3507.52,3952.52 R16.2 ; v1(3905,3925) R17.1 ; v1(4059,3527) v1@4065.38,3520.62 ; R15.2 4080,3699.96 4065.38,3685.34 v1@4065.38,3520.62 ; R14.2 R14.2@4115,3384.96 ; v1@4065.38,3520.62 4115,3471 R14.2@4115,3384.96 ; v1@4065.38,3520.62 4065.38,3462.19 4113,3414.56 4113,3384.96 R14.2@4115,3384.96
  Bottom Layer w30: CN1.1 3380,3825 ; v1(3905,3925) 3901.17,3928.83 3841.17,3928.83 3820,3950 v1(3505,3950) 3380,3825 ; v1(4059,3527) 4059,3766 4000,3825 3380,3825
NetCN2_1: CN2.1 L2.4 | length 532.6
  Bottom Layer w30: CN2.1 3485,3210 L2.4
NetCN2_2: CN2.2 L2.3 | length 487.1
  Bottom Layer w30: CN2.2 3358,3420 3363,3425 L2.3
NetCN3_1: CN3.1 K1.5 | length 1767.1
  Top Layer w30: K1.5 4225,1902 4320,1807 v1(4320,1703)
  Bottom Layer w30: CN3.1 3457,1623 4280,1623 4320,1663 v1(4320,1703)
NetCN3_2: CN3.2 K1.8 | length 1217.7
  Top Layer w30: v1(4200,2252) 4225,2277 K1.8
  Bottom Layer w30: CN3.2 3192,2252 v1(4200,2252)
NetCN4_1: CN4.1 J11.1 | length 3230.3
  Top Layer w30: J11.1 4170,1080 5341,1080 5381,1120 5381,2596.41 5367,2610.41 5367,2803 CN4.1
NetCN4_2: CN4.2 J10.3 | length 1818.8
  Top Layer w30: CN4.2 5327,2633 5327,1220 J10.3
NetCN5_1: CN5.1 J11.2 | length 2018.3
  Top Layer w30: v1(4954,1984) 4954,2525 5000,2571 5189,2571 CN5.1
  Bottom Layer w30: J11.2 v1(4954,1984)
NetCN5_2: CN5.2 J10.2 | length 1350.4
  Top Layer w30: CN5.2 5181,2369 5181,1259 J10.2
NetCN6_2: CN6.2 J10.1 | length 899
  Top Layer w30: CN6.2 5120,2020 J10.1
NetCN7_2: CN7.2 F1.1 K1.4 R20.2 R24.1 T3.3 T4.3 | length 5477.8
  Top Layer w30: v1(3852.48,2795) v1@3852.48,2783 ; T3.3 3883.74,2814.26 v1@3852.48,2783 ; K1.4 4125,2127 3881,2371 3881,2601.48 3852.48,2630 R20.2 v1@3852.48,2783 ; v1(4670,2795) 4760,2705 R24.1 4805,1760 4857,1708 5050,1708 CN7.2
  Bottom Layer w30: T4.3 v1(3852.48,2795) v1(4670,2795) ; CN7.2 5830,900 F1.1
NetD2_2: D2.2 T5.3 | length 748
  Top Layer w30: v1(3532,2200) 3540,2208 T5.3
  Bottom Layer w30: v1(3532,2200) 3820.91,1911.09 D2.2
NetIC1_1: IC1.1 R18.1 | length 586.7
  Top Layer w30: R18.1 3572.48,3859 3619,3905.52 3619,4272.25 IC1.1
NetIC1_2: IC1.2 J4.2 R1.1 | length 3595.9
  Top Layer w30: IC1.2 v1(3680,4624) ; R1.1 5752.52,5277.48 5800,5230 J4.2
  Bottom Layer w30: v1(3680,4624) 5420,4624 5808,5012 6102.43,5012 6180.43,5090 6180.43,5169.57 J4.2
NetIC1_7: IC1.7 J5.2 | length 673.1
  Bottom Layer w30: IC1.7 4336.25,4155 4480.57,4155 4645.57,3990 J5.2
NetIC1_8: IC1.8 J5.1 | length 1035.1
  Bottom Layer w30: IC1.8 4384.25,4207 4508.68,4207 4657.66,4058.03 4758.97,4058.03 4787,4030 4787,3960 4724,3897 4603,3897 J5.1
NetIC1_11: IC1.11 R24.2 R25.1 ZD1.1 | length 3876.1
  Top Layer w30: R25.1 R25.1@4805,3035 ; R24.2 R25.1@4805,3035 ; ZD1.1 5407,2693 5407,2966 5338,3035 R25.1@4805,3035
  Bottom Layer w30: IC1.11 4688.25,4203 4812,4203 4877,4138 4992,4138 5247,3883 5467,3883 5650,3700 5650,3124 5471,2945 5471,2629 ZD1.1
NetIC1_12: IC1.12 J7.1 | length 1128.1
  Bottom Layer w30: IC1.12 4740.15,4251.1 4836.21,4251.1 4907.63,4179.67 5485.33,4179.67 J7.1
NetIC1_13: IC1.13 J7.2 | length 1405
  Top Layer w30: IC1.13 4968.75,4500 5560,4500 5612,4448 5612,4027 J7.2
NetIC1_14: IC1.14 J7.3 | length 1181
  Top Layer w30: IC1.14 4991.75,4423 5520,4423 5572,4371 5572,4087 J7.3
NetIC1_15: IC1.15 J7.4 | length 1000.5
  Top Layer w30: IC1.15 5034.75,4366 5506,4366 5532,4340 5532,4147 J7.4
NetIC1_16: IC1.16 J7.5 | length 1437.2
  Bottom Layer w30: IC1.16 5171.58,4219.67 5680,4219.67 5736,4163.67 5736,3939 5720,3923 5342,3923 J7.5
NetIC1_19: IC1.19 R23.2 | length 5264.9
  Top Layer w30: v1(2968,4348) 2968,2349 3068,2249 3162,2249 3442.52,1968.48 R23.2
  Bottom Layer w30: v1(2968,4348) 3026,4406 5285.25,4406 IC1.19
NetIC1_20: IC1.20 J6.3 | length 789.1
  Bottom Layer w30: IC1.20 5803.75,4635 J6.3
NetIC1_21: IC1.21 J6.1 | length 1618.9
  Top Layer w30: IC1.21 5452,4946.75 5452,5120 5475,5143 5528.1,5143 5633,5038.1 v1(5633,4713)
  Bottom Layer w30: v1(5633,4713) 6163,4713 6196,4680 6196,4496 J6.1
NetIC1_22: IC1.22 J6.2 | length 1753.2
  Top Layer w30: IC1.22 5380,5131 5440,5191 5560.6,5191 5683,5068.6 v1(5683,4410)
  Bottom Layer w30: v1(5683,4410) 5808,4535 J6.2
NetIC1_23: IC1.23 J3.3 | length 441.5
  Bottom Layer w30: J3.3 5080,5075 5123.75,5075 IC1.23
NetIC1_24: IC1.24 J3.2 | length 441.5
  Bottom Layer w30: J3.2 5056,4999 5099.75,4999 IC1.24
NetIC1_27: IC1.27 J12.1 | length 1039.7
  Top Layer w30: J12.1 4130,5185 4130,5120 4211.17,5038.83 4276.17,5038.83 v1(4280,5035)
  Bottom Layer w30: v1(4280,5035) 4283.83,5038.83 4311.12,5038.83 4324.29,5052 4746.75,5052 IC1.27
NetIC1_28: IC1.28 J12.4 | length 2751
  Top Layer w30: IC1.28 4857.75,4841 5480,4841 5532,4893 5532,5061 v1(5502,5091)
  Bottom Layer w30: J12.4 4180,5215 4170,5215 4160,5225 4160,5383 4200,5423 5170,5423 v1(5502,5091)
NetIC1_30: IC1.30 J12.5 | length 452.8
  Top Layer w30: J12.5 4345,5150 v1(4345,5002)
  Bottom Layer w30: v1(4345,5002) 4496.75,5002 IC1.30
NetIC1_33: IC1.33 J8.1 | length 688.6
  Bottom Layer w30: J8.1 3796.72,5118.28 3848.21,5118.28 3956.17,5010.33 4188.42,5010.33 IC1.33
NetIC1_34: IC1.34 J8.2 | length 488.6
  Top Layer w30: J8.2 3961,5054 4044.75,5054 IC1.34
NetIC1_35: IC1.35 J1.8 R3.1 | length 1780.6
  Top Layer w30: R3.1 3466.48,5172.52 3649,4990 4008.75,4990 IC1.35
  Bottom Layer w30: J1.8 3888.73,4727.48 IC1.35
NetIC1_36: IC1.36 J1.4 R2.1 | length 1519.5
  Top Layer w30: J1.4 3201,4632.26 3201,5177.52 R2.1 3241.48,5177.52 v1(3317,5102)
  Bottom Layer w30: v1(3317,5102) 3342.36,5076.64 3822.11,5076.64 IC1.36
NetIC1_37: IC1.37 J1.3 | length 1945
  Bottom Layer w30: J1.3 2855,4775 2855,5248 2880,5273 3040,5273 3279,5034 3764.75,5034 IC1.37
NetIC1_38: IC1.38 J1.5 | length 1213.9
  Top Layer w30: J1.5 3009,4699.74 3009,4978 v1(3091,5060)
  Bottom Layer w30: v1(3091,5060) 3175,4976 3722.75,4976 IC1.38
NetIC1_39: IC1.39 J1.7 | length 837.3
  Bottom Layer w30: J1.7 3009,4778.48 3009,4840 3036,4867 3628.25,4867 IC1.39
NetIC1_40: IC1.40 TP1.1 | length 844.2
  Bottom Layer w30: TP1.1 2910,5118.56 3109.81,4918.75 IC1.40
NetIC2_1: IC2.1 R8.2 R9.1 | length 906.7
  Top Layer w30: R8.2 R9.1 v1(4755,3387.48)
  Bottom Layer w30: v1(4755,3387.48) 5012.52,3645 IC2.1
NetIC2_2: IC2.2 R10.2 R12.2 | length 1160
  Top Layer w30: R12.2 4488,3102.48 4662.52,3277 4900,3277 4930,3307 v1(4930,3390) 4928.74,3388.74 4861.26,3388.74 R10.2
  Bottom Layer w30: v1(4930,3390) 4932.52,3387.48 5137.48,3387.48 IC2.2
NetIC2_6: IC2.6 R11.2 R13.2 | length 1416.8
  Top Layer w30: R11.2 R13.2@4860,3674.96 ; v1(4860,3779) R13.2@4860,3674.96 ; R13.2 R13.2@4860,3674.96
  Bottom Layer w30: v1(4860,3779) 4924,3843 5446,3843 5489,3800 5489,3529 5560,3458 5560,3445 IC2.6
NetIC2_7: IC2.7 R7.2 R11.1 | length 2405
  Top Layer w30: R7.2 4530.52,3682.48 4603,3610 R11.1 4782,3610 4992,3400 4992,3149 5040,3101 5329,3101 5459,2971 5459,2847 5480,2826 5537,2826 5650,2939 5650,3490 IC2.7
NetIC8_2: IC8.2 KW4-801AVB.11 | length 1573.5
  Top Layer w30: IC8.2 4310,6444.43 4375.43,6379 5120,6379 5180,6439 KW4-801AVB.11
NetIC8_3: IC8.3 KW4-801AVB.4 | length 604
  Top Layer w30: IC8.3 4461,6531 4461,6969 4480,6988 KW4-801AVB.4
NetIC8_4: IC8.4 KW4-801AVB.2 | length 815.7
  Top Layer w30: KW4-801AVB.2 4360,6975 4360,6451 4380,6431 4461,6431 IC8.4
NetIC8_5: IC8.5 KW4-801AVB.5 | length 603.2
  Top Layer w30: KW4-801AVB.5 4561,7036 4561,6738 4610,6689 IC8.5
NetIC8_6: IC8.6 KW4-801AVB.7 | length 669.4
  Bottom Layer w30: IC8.6 4859,6629 4859,6976 KW4-801AVB.7
NetIC8_7: IC8.7 KW4-801AVB.8 | length 644.6
  Top Layer w30: IC8.7 4761,6529 4761,6936 KW4-801AVB.8
NetIC8_8: IC8.8 KW4-801AVB.9 | length 646.2
  Top Layer w30: IC8.8 4859,6531 4859,6934 KW4-801AVB.9
NetIC8_9: IC8.9 KW4-801AVB.6 | length 1444.8
  Bottom Layer w30: KW4-801AVB.6 4740,7115 5320,7115 5340,7095 5340,6810 IC8.9
NetIC8_12: IC8.12 KW4-801AVB.12 | length 404
  Bottom Layer w30: IC8.12 5240,7016.3 5240,7055 KW4-801AVB.12
NetIC8_13: IC8.13 KW4-801AVB.10 | length 339.1
  Bottom Layer w30: IC8.13 5080,6956.3 KW4-801AVB.10
NetIC8_14: IC8.14 KW4-801AVB.3 | length 541.3
  Bottom Layer w30: KW4-801AVB.3 4459,6976 4620.3,6976 IC8.14
NetIC8_15: IC8.15 KW4-801AVB.1 | length 641.3
  Bottom Layer w30: KW4-801AVB.1 4320,6915 4581.3,6915 IC8.15
NetIC8_17: IC8.17 J9.8 | length 1484.2
  Bottom Layer w30: J9.8 3091.11,6737 4460.7,6737 IC8.17
NetIC8_18: IC8.18 J9.4 | length 1795.3
  Bottom Layer w30: J9.4 4409.69,6611.26 4558.43,6760 4558.43,6820 4543.7,6834.73 4458.43,6834.73 IC8.18
NetL2_1: L2.1 T4.2 TP5.1 | length 2323.5
  Bottom Layer w30: T4.2 3073,2757 3073,2854 3120,2901 3220,2901 3268,2853 3600,2853 3627,2880 3627,3194.43 3757.57,3325 L2.1 4220,3325 TP5.1
NetR9_2: R9.2 R10.1 | length 210
  Top Layer w30: R9.2 R10.1
NetR18_2: R18.2 R19.2 T1.1 | length 1496.5
  Top Layer w30: R18.2 3507.52,3720 3547.52,3680 3797,3680 3830,3713 ; v1(3820,3270) 3820,3489.21 3830,3499.21 3830,3713 ; R19.2 3832.52,3755 3832.52,3715.52 3830,3713 ; v1(3946,2905) 4001.4,2905 4054,2852.4 T1.1
  Bottom Layer w30: v1(3820,3270) 3946,3144 v1(3946,2905)
NetR20_1: R20.1 T1.3 T2.1 T3.1 | length 2567.1
  Top Layer w30: R20.1 3787.52,2577.52 3716,2506 3102,2506 3048,2560 3048,2920 3115.4,2987.4 T2.1 3509.57,2987.4 3517.16,2995 T3.1 3805,3010 4139.37,3010 4189.37,2960 T1.3
NetR21_1: R21.1 T2.2 T3.2 | length 684.8
  Top Layer w30: R21.1 3442.52,2768 3457.44,2782.92 T2.2 3494.4,2912.6 3507,2900 3507,2880 3527,2860 3606.25,2860 3666.45,2920.2 T3.2
NetR21_2: R21.2 T4.1 | length 420.4
  Top Layer w30: T4.1 3408,2595 3415,2588 3495.48,2588 3507.48,2600 R21.2
NetR22_1: R22.1 R23.1 T5.1 | length 739.1
  Top Layer w30: T5.1 3461.26,2391 3560,2391 3583,2368 3583,2173.52 3522.48,2113 R22.1 3522.48,1940 3507.48,1925 R23.1
pads on no net: IC1.3 IC1.4 IC1.25 IC1.26 IC8.10 IC8.11 IC8.19 IC8.20 J1.6 J9.6 K1.1 K1.3 K1.10 K1.12 L1.2 RE1.2 SW1.6 SW1.7